# Altium PCB WaveGenerator.PcbDoc
Units mil, origin at the board's own origin, x right, y up, seen from the top; angles counter-clockwise.
Board outline 1620.03 x 865.03 mil, 2 copper layers (Top Layer, Bottom Layer); 12 components, 9 nets, 42 pads, 4 vias.
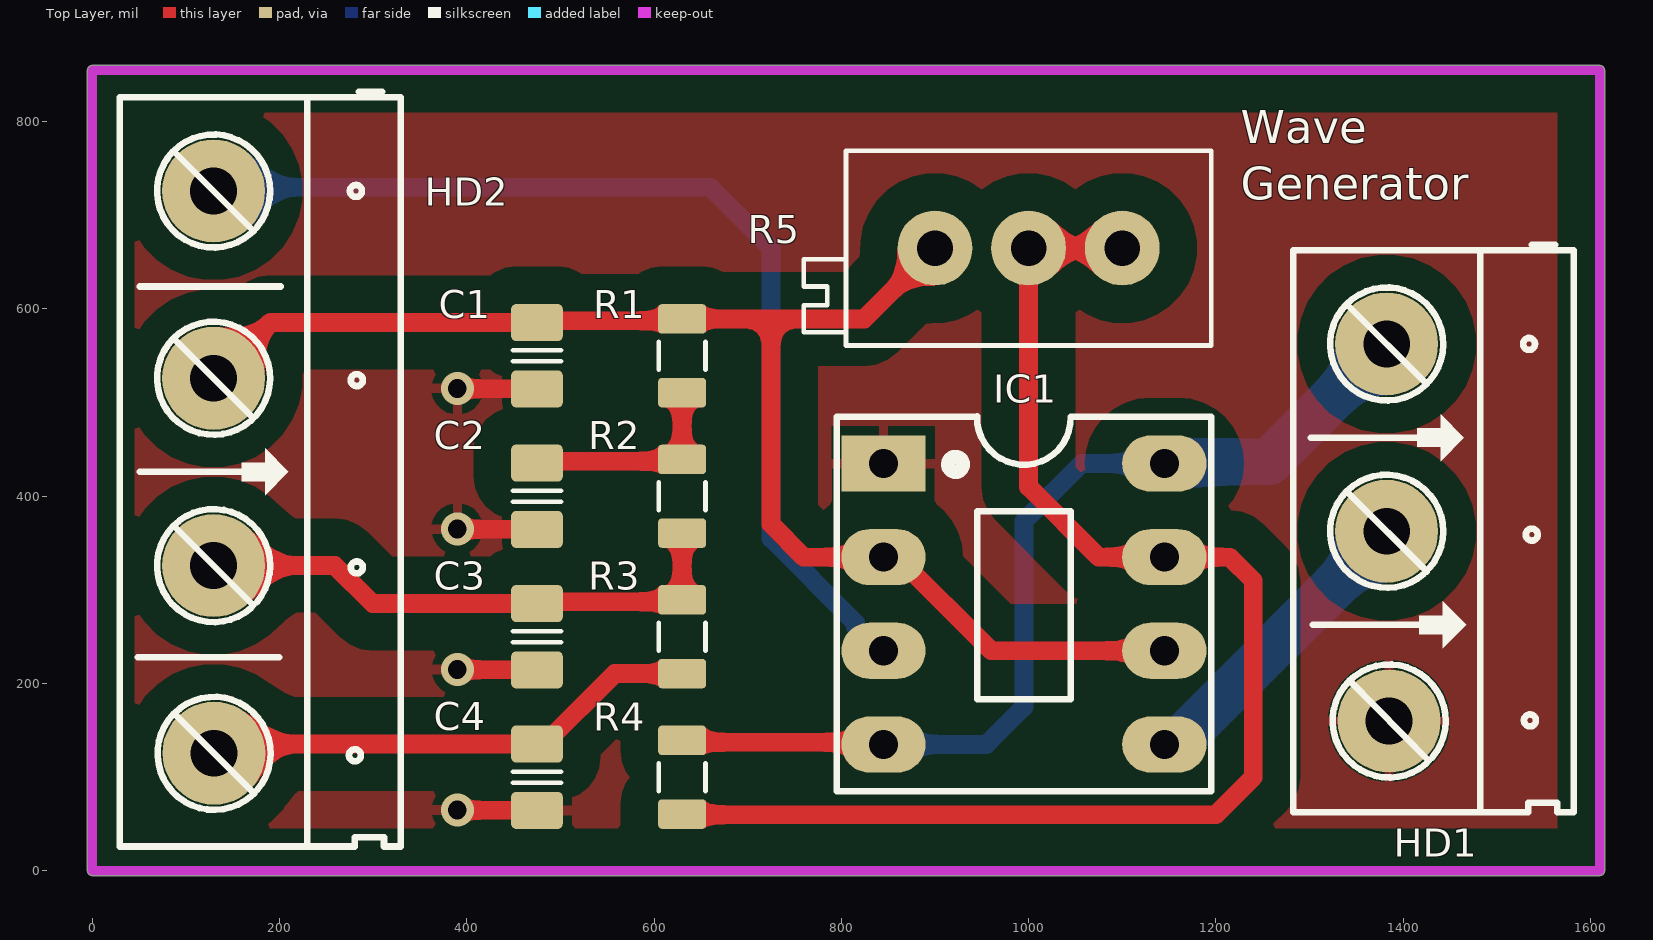
[diagram p0: Top Layer view]
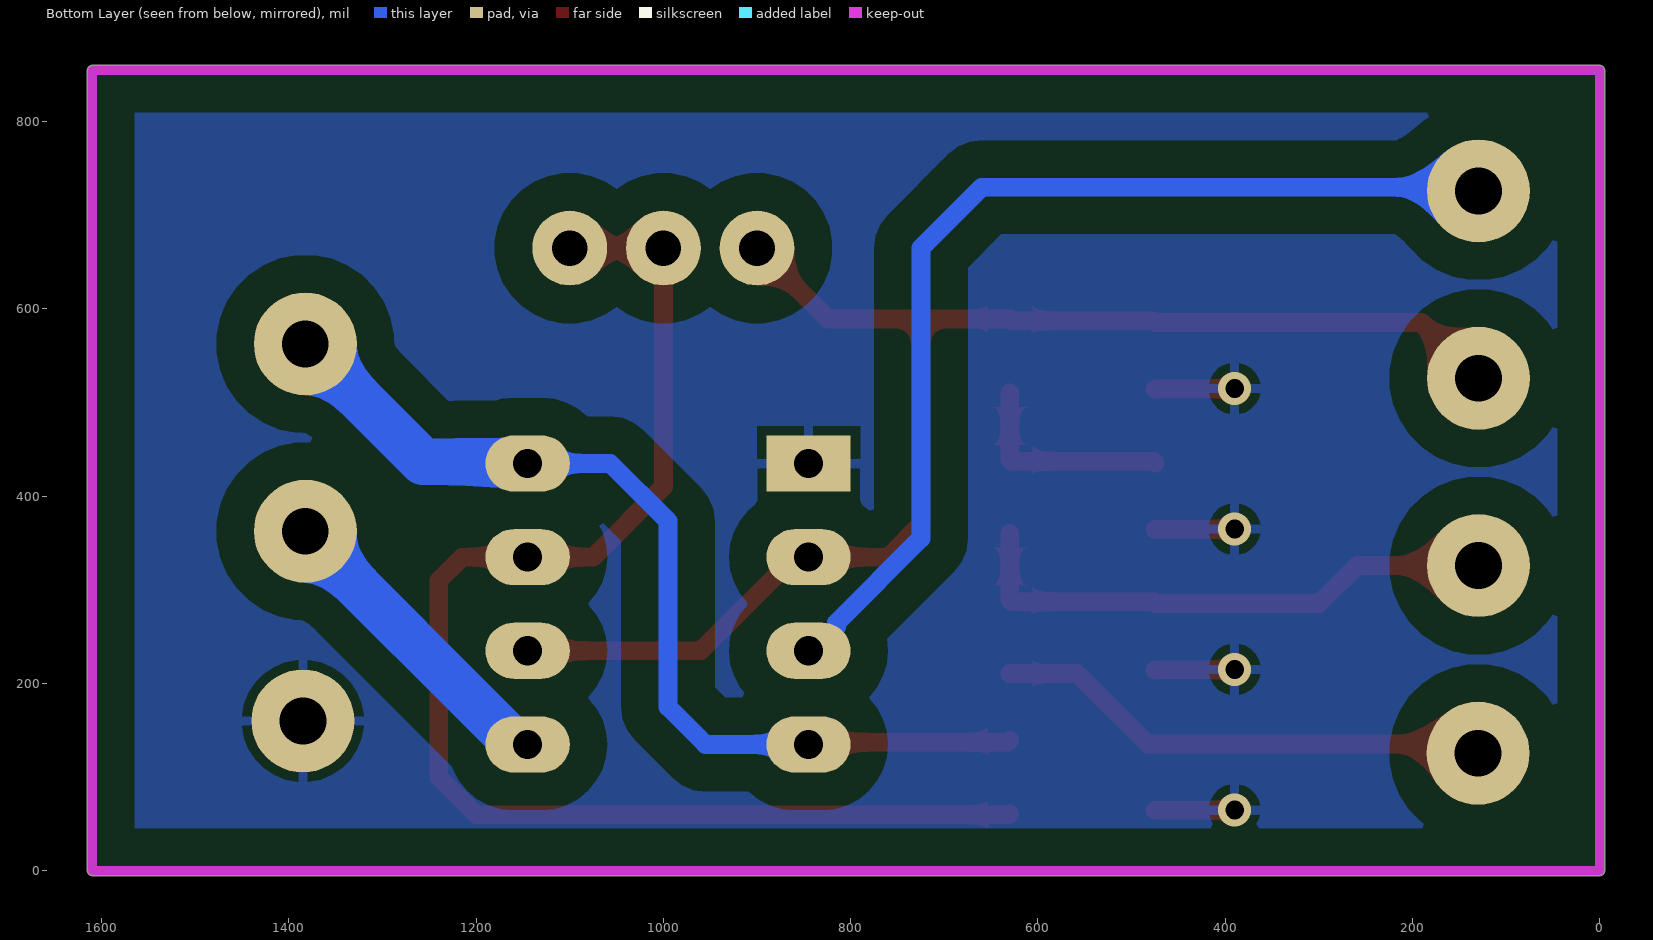
[diagram p1: Bottom Layer view, seen from below]
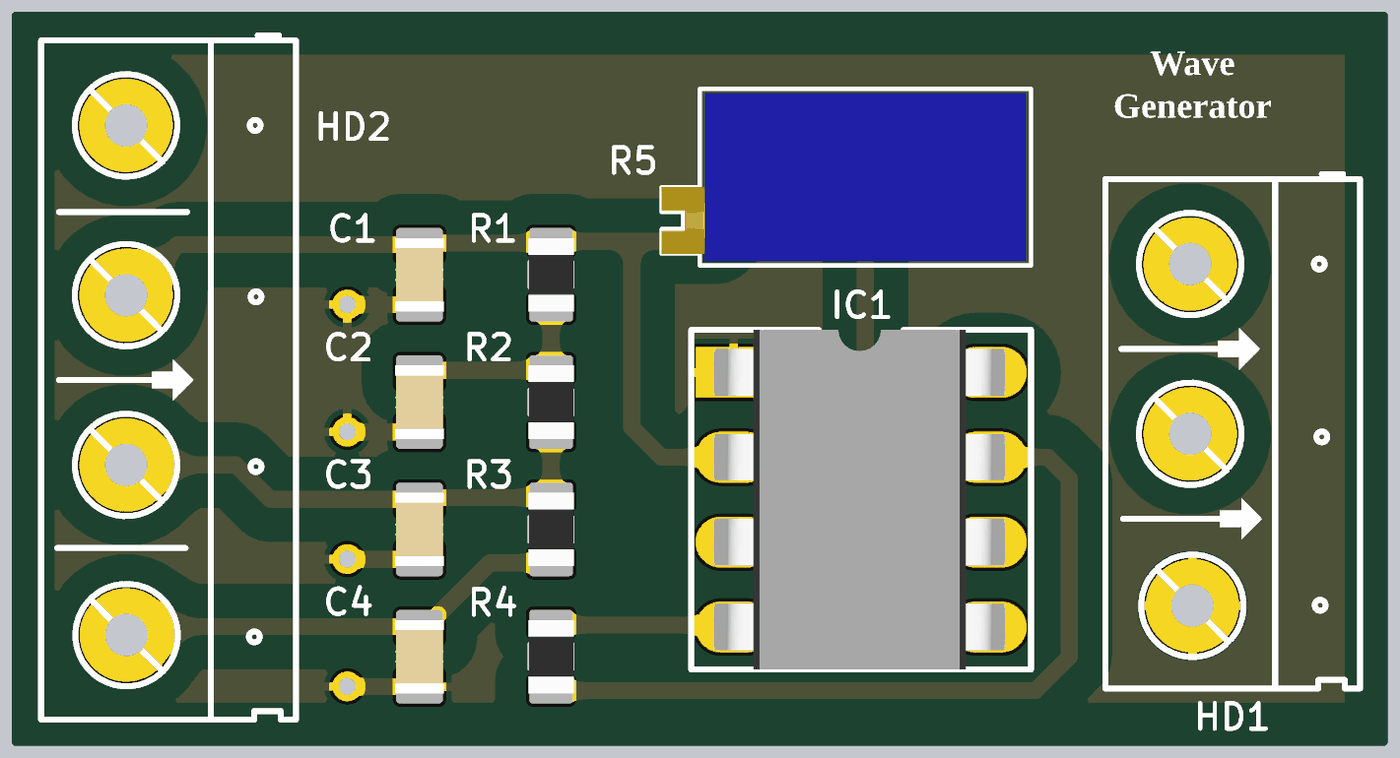
[diagram p2: 3D render of the assembled board from above, using the file's embedded part models]

## Layer stack, top to bottom
Top Solder: solder mask 0.4, Solder Resist, Dk 3.5
Top Layer: signal copper 1.4
Dielectric 1: dielectric 12.6, FR-4, Dk 4.8
Bottom Layer: signal copper 1.4
Bottom Solder: solder mask 0.4, Solder Resist, Dk 3.5

## Board outline
0,-5.01 cw(c0,0) -5.01,0 -5.01,855 cw(c0,855) 0,860.01 1610,860.01 cw(c1610,855) 1615.02,855 1615.02,0 cw(c1610,0) 1610,-5.01

## Design rules (kind name [scope] priority, off if disabled: settings)
Clearance [All] p1: gap=40 ignorepadtopadclearanceinfootprint=FALSE
PolygonConnect [All] p1: connectstyle=Relief reliefconductorwidth=10 reliefentries=4 polygonreliefangle="90 Angle" airgapwidth=10
RoutingVias [All] p1: holewidth=20 width=35 viastyle="Through Hole" minholewidth=15 minwidth=25 maxholewidth=28 maxwidth=50
SolderMaskExpansion [All] p1: expansion=4 istentingtop=FALSE
Width [All] p1: maxlimit=50 minlimit=10 preferedwidth=20
30 further rules are at their usual default settings.

## Components (designator, comment, footprint, x,y, rotation, side; value= is the part's Value field where it differs from the comment)
C1 "approved sub OK" CAPC2012X135N 475,550 r270 top value=1n8
C2 "approved sub OK" CAPC2012X135N 475,400 r270 top value=1n8
C3 "approved sub OK" CAPC2012X135N 475,250 r270 top value=1n8
C4 "approved sub OK" CAPC2012X135N 475,100 r270 top value=1n8
HD1 "Header 3" HED3 1382.38,562.62 r270 top
HD2 "Header 4" HED4 129.61,726 r270 top
IC1 "LM555" DIP8/W0.3 845,435 r270 top
R1 "Jumper" RESC2012N_ZERO 630,550 r270 top value=1k
R2 "Jumper" RESC2012N_ZERO 630,400 r270 top value=1k
R3 "Jumper" RESC2012N_ZERO 630,250 r270 top value=10k
R4 "Jumper" RESC2012N_ZERO 630,100 r270 top value=1k
R5 "25 turns" TRIMPOT_THT_PV36X 1000,665 r0 top value=10K

## Footprints (in the part's own frame and the unit in brackets; to place one, negate y for a bottom-side part, rotate by r counter-clockwise, add the part's x,y. Pads: shape width x height; smd on the part's side, far side on the other; paste and mask are expansions set on the pad)
CAPC2012X135N [mm] "Chip Capacitor, Body 2.0x1.2mm, EIA 0805, IPC Medium Density"
  round 0.254 on Mech15: 0(0,0)
  rrect25% 1x1.4 smd: 1(-0.9,0) 2(0.9,0)
  Top Layer pour cut-out: -0.675,0.7 -0.475,0.9 0.475,0.9 0.675,0.7 0.675,-0.7 0.475,-0.9 -0.475,-0.9 -0.675,-0.7
  silkscreen extent -0.15,-0.65 0.15,0.65, body extent -1.1,-0.72 1.1,0.73, height 1.34
DIP8/W0.3 [mil] "8 PIN, W 300mil, Pin to pin 100mil"
  rect 60x90 hole 31: 1(0,0)
  oval 60x90 hole 31: 2(100,0) 3(200,0) 4(300,0) 5(300,300) 6(200,300) 7(100,300) 8(0,300)
  silkscreen extent -50,-50 350,350, body extent -50,-40 350,336, height 201
HED3 [mil] "Header 3, 3 pin, hight 300mil, Pin to Pin 200, Colour Green"
  round 110 hole 50: 1(0,0) 2(200,0) 3(402.62,2.62)
  silkscreen extent -106,-100 500,200
HED4 [mil] "Header 4, 4 pin, hight 300mil, Pin to Pin 200, Colour Green"
  round 110 hole 50: 1(0,0) 2(200,0) 3(400.06,0.06) 4(600.39,0.39)
  silkscreen extent -106,-100 700,200
RESC2012N_ZERO [mm] "Chip Resistor, Body 2.0x1.2mm, 0805, IPC Medium Density"
  round 0.254 on Mech15: 0(0,0)
  rrect25% 0.8x1.3 smd: 1(-1,0) 2(1,0)
  Top Layer pour cut-out: -0.725,0.65 -0.525,0.85 0.525,0.85 0.725,0.65 0.725,-0.65 0.525,-0.85 -0.525,-0.85 -0.725,-0.65
  silkscreen extent -0.38,-0.64 0.38,0.64, body extent -1.1,-0.67 1.1,0.68, height 0.69
TRIMPOT_THT_PV36X [mil] "TRIMMER, MURATA, PV36X"
  round 80 hole 38: CCW(100,0) CW(-100,0) W(0,0)
  silkscreen extent -240,-104 195,104, body extent -240,-98 189,98, height 394

## Part data
C1 C2 C3 C4: library part "CAP C_0805", "Capacitor SMD Cer 1.8nF 10% 50V X7R 0805", Manufacturer 1="AVX Corporation", Manufacturer Part Number 1=08055C182KAT2A, Operating Temperature="-55°C ~ 125°C", Package / Case="0805 (2012 metric)", Ratings="50V; X7R", Supplier Part Number 1=478-1374-1-ND, Tolerance=±10%, SCDType=source*, Supplier 1=Digi-Key
HD1: "Header 3 (Green)"
HD2: "Header 4 (Green)"
IC1: "Timer"
R1 R2 R3 R4: library part RES_0805, "Resistor SMD chip 0.0 Ohm 0.125W 0805", Manufacturer 1="Samsung Electro-Mechanics America, Inc", Manufacturer 2="Stackpole Electronics Inc", Manufacturer 3=Yageo, Manufacturer 4="Panasonic Electronic Components", Manufacturer 5="Rohm Semiconductor", Manufacturer Part Number 1=RC2012J000CS, Manufacturer Part Number 2=RMCF0805ZT0R00, Manufacturer Part Number 3=RC0805JR-070RL, Manufacturer Part Number 4=ERJ-6GEY0R00V, Manufacturer Part Number 5=MCR10ERTJ000, Package / Case="0805 (2012 metric)", Ratings=1/8W, Supplier Part Number 1=1276-5466-6-ND, Tolerance=N/A, ComponentLink1Description=http://www.samsungsem.com/servlet/FileDownload?filename=productcatalog/pdf/Chip_Resistor.pdf, ComponentLink1URL=http://www.samsungsem.com/servlet/FileDownload?filename=productcatalog/pdf/Chip_Resistor.pdf, ComponentLink2Description=http://www.seielect.com/Catalog/SEI-RMCF_RMCP.pdf, ComponentLink2URL=http://www.seielect.com/Catalog/SEI-RMCF_RMCP.pdf, ComponentLink3Description=http://media.digikey.com/pdf/Data%20Sheets/Yageo%20PDFs/RC0805%20Pb%20Free.pdf, ComponentLink3URL=http://media.digikey.com/pdf/Data%20Sheets/Yageo%20PDFs/RC0805%20Pb%20Free.pdf, ComponentLink4Description=http://industrial.panasonic.com/www-cgi/jvcr13pz.cgi?E+PZ+3+AOA0001+ERJ6GEY0R00V+7+WW, ComponentLink4URL=http://industrial.panasonic.com/www-cgi/jvcr13pz.cgi?E+PZ+3+AOA0001+ERJ6GEY0R00V+7+WW, ComponentLink5Description=http://rohmfs.rohm.com/en/products/databook/datasheet/passive/resistor/chip_resistor/mcr_g.pdf, ComponentLink5URL=http://rohmfs.rohm.com/en/products/databook/datasheet/passive/resistor/chip_resistor/mcr_g.pdf, RoHS 1="RoHS Compliant", RoHS 2="RoHS Compliant", RoHS 3="RoHS Compliant", RoHS 4="RoHS Compliant", RoHS 5="RoHS Compliant", SCDType=spec, Supplier 1=Digi-Key, Supplier 2=Digi-Key, Supplier 3=Digi-Key, Supplier 4=Digi-Key, Supplier 5=Digi-Key, Supplier Part Number 2=RMCF0805ZT0R00DKR-ND, Supplier Part Number 3=311-0.0ARDKR-ND, Supplier Part Number 4=P0.0ADKR-ND, Supplier Part Number 5=RHM0.0CPDKR-ND
R5: library part RES_TRIMMER_10K_25T_THT, "Trimmer THD 10K 500mW 25-turn", Manufacturer 1="Murata Electronics North America", Manufacturer Part Number 1=PV36X103C01B00, Package / Case="10.9mm L x 5.0mm W x 10.0mm H", Ratings="1/2W; ±100ppm/°C", Supplier Part Number 1=490-2894-ND, Tolerance=±10%, Material=Cermet, SCDType=spec, Supplier 1=Digi-Key

## Via types
v1: diameter 35, hole 20, Top Layer to Bottom Layer, 4 vias

## Nets (pads, with @x,y where several pads share a name; then routed paths per layer and width w, separated by ;. In a path a pad name is that pad's centre, name@x,y a point inside that pad or via, vN(x,y) a via of type N, cw(c..) or ccw(c..) an arc to the next point about the centre after c; other vN are vias at no path point)
+3.33: HD1.2 IC1.5 | length 333.2
  Bottom Layer w50: IC1.5 1157.38,135 1382.38,360 HD1.2
+5: HD1.1 IC1.4 IC1.8 R4.1 | length 1047.5
  Top Layer w20: R4.1 632.18,137.19 842.81,137.19 IC1.4
  Bottom Layer w20: IC1.4 955,135 995,175 995,373.28 1056.72,435 IC1.8
  Bottom Layer w50: IC1.8 1146.91,436.91 1256.68,436.91 HD1.1
GND: C1.2 C2.2 C3.2 C4.2 HD1.3 IC1.1 | length 340.7
  Top Layer w20: v1(390,65) 390.22,64.78 474.78,64.78 C4.2 ; v1(390,215) 390.22,214.78 474.78,214.78 C3.2 ; v1(390,365) 390.22,364.78 474.78,364.78 C2.2 ; v1(390,515) 390.22,514.78 474.78,514.78 C1.2
NetC1_1: C1.1 HD2.2 IC1.2 IC1.6 R1.1 R5.CW | length 1523.3
  Top Layer w20: HD2.2 130.95,526 190.38,585.43 C1.1 476.97,587.4 628.03,587.4 R1.1 725,589.37 ; R5.CW 824.37,589.37 725,589.37 ; IC1.6 960,235 860,335 760,335 725,370 725,589.37
NetC2_1: C2.1 R1.2 R2.1 | length 227.9
  Top Layer w20: C2.1 476.97,437.4 628.03,437.4 R2.1 R1.2
NetC3_1: C3.1 HD2.3 R2.2 R3.1 | length 589.2
  Top Layer w20: HD2.3 259.06,325.94 299.57,285.43 465.16,285.43 C3.1 ; C3.1@475,287.4 628.03,287.4 R3.1 R2.2
NetC4_1: C4.1 HD2.4 R3.2 | length 535.2
  Top Layer w20: HD2.4 139.83,135.43 482.87,135.43 558.07,210.63 R3.2
NetHD2_1: HD2.1 IC1.3 | length 1113.1
  Bottom Layer w20: HD2.1 133.61,730 660,730 725,665 725,355 815.07,264.93 815.07,260.75 845.74,230.09 IC1.3@849.91,230.09
NetIC1_7: IC1.7 R4.2 R5.CCW R5.W | length 1473.3
  Top Layer w20: R4.2 630.63,60 1200,60 1240,100 1240,310 1215,335 IC1.7 1075,335 1000,410 R5.W R5.CCW
pads on no net: C1.0 C2.0 C3.0 C4.0 R1.0 R2.0 R3.0 R4.0

## Polygon pours and split planes (outlines as drawn)
GND on Top Layer "Top Poly" (solid, remove dead copper, pour order 0): 0,855 1610,855 1610,0 0,0
GND on Bottom Layer "Bot Poly" (solid, remove dead copper, pour order 1): 0,855 1610,855 1610,0 0,0

## Keep-outs
Keep-Out Layer:
  lines w10: 0,0 1610,0 1610,855 0,855 0,0

## Silkscreen, mask and mechanical layers (free items; w line width, h text height)
Top Overlay:
  text "Wave / Generator" at 1226.68,705 h60